# Altium PCB ADL5511.PcbDoc
Units mil, origin at the board's own origin, x right, y up, seen from the top; angles counter-clockwise.
Board outline 920 x 1005 mil, 4 copper layers (Top Layer, Layer 1, Layer 2, Bottom Layer), stack 23.756 mil thick; 34 components, 21 nets, 104 pads, 151 vias.
Unrouted connection lines stored in the file: 1.
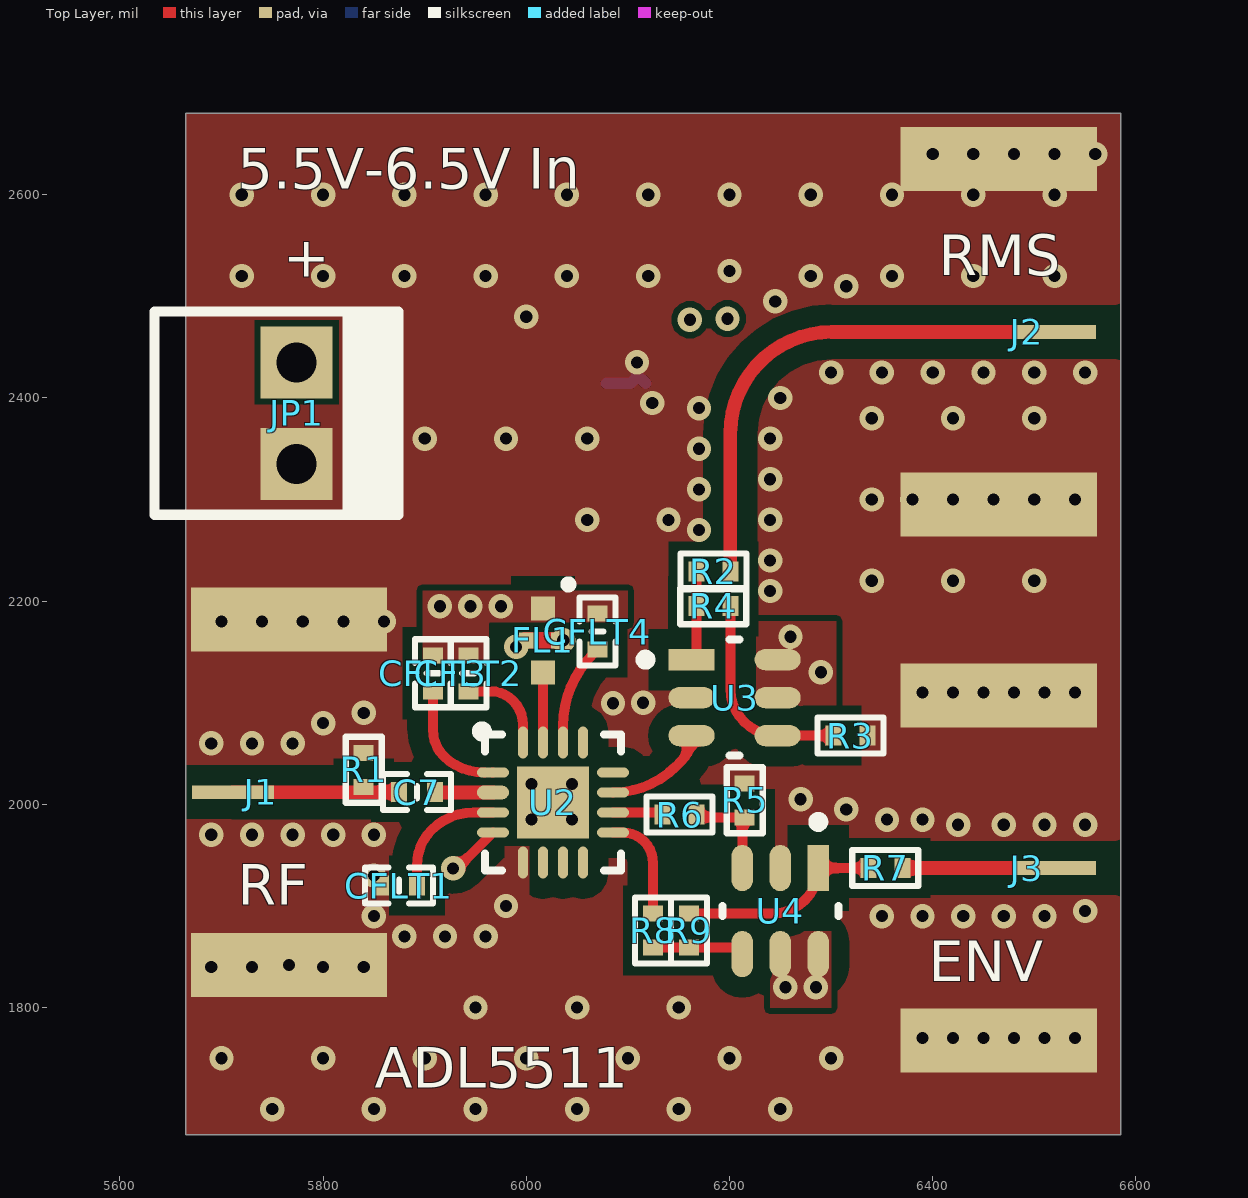
[diagram p0: Top Layer view]
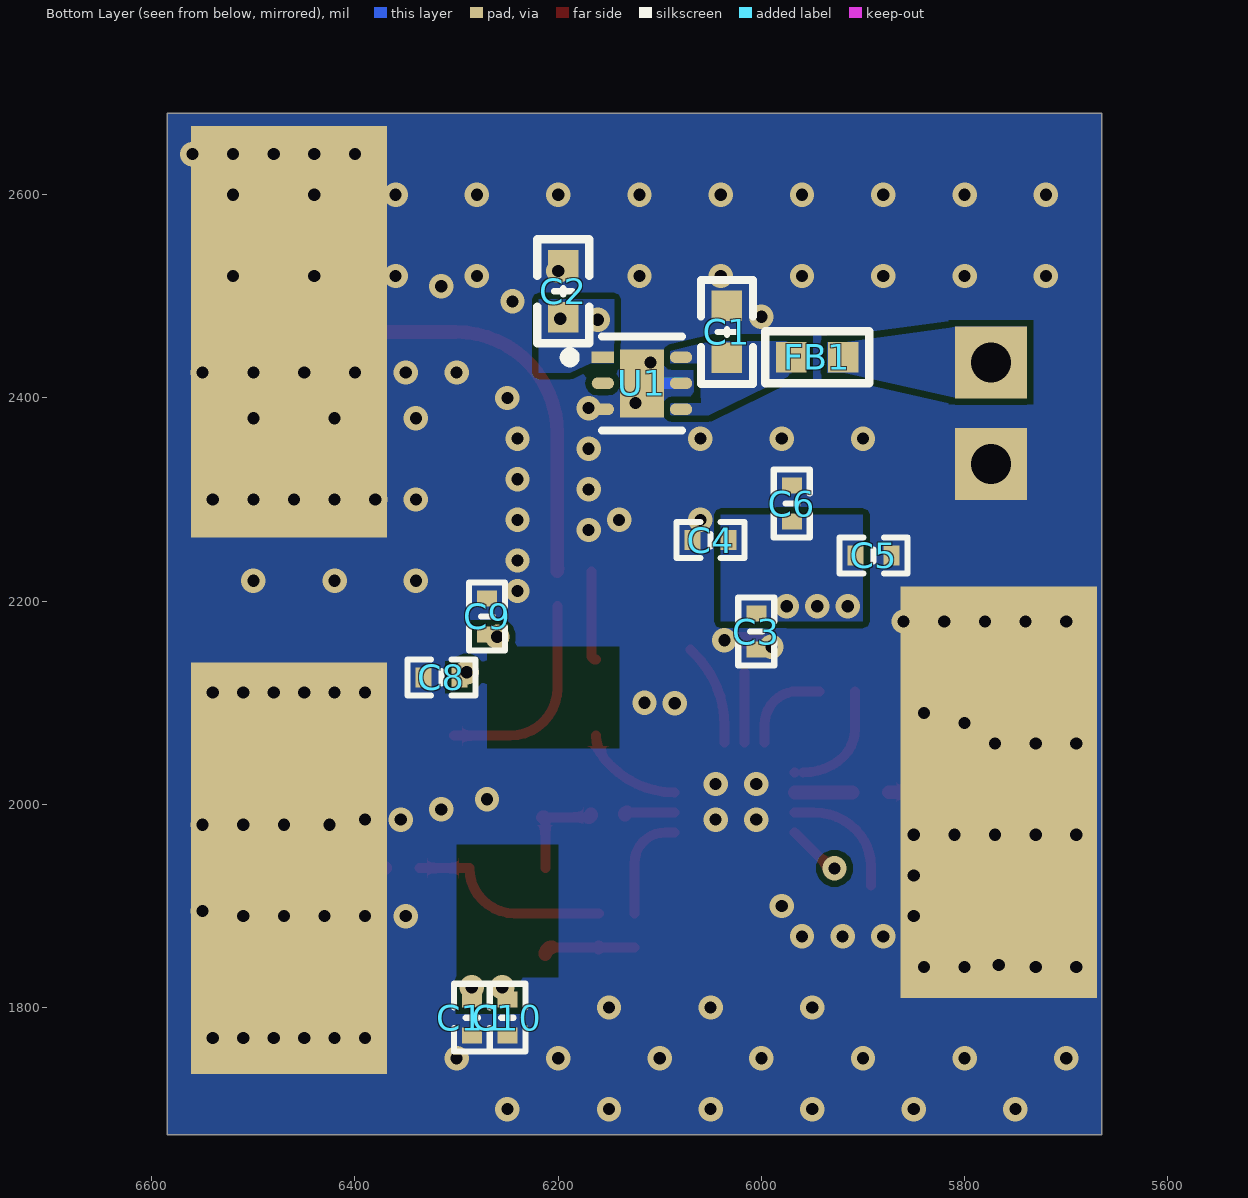
[diagram p1: Bottom Layer view, seen from below]
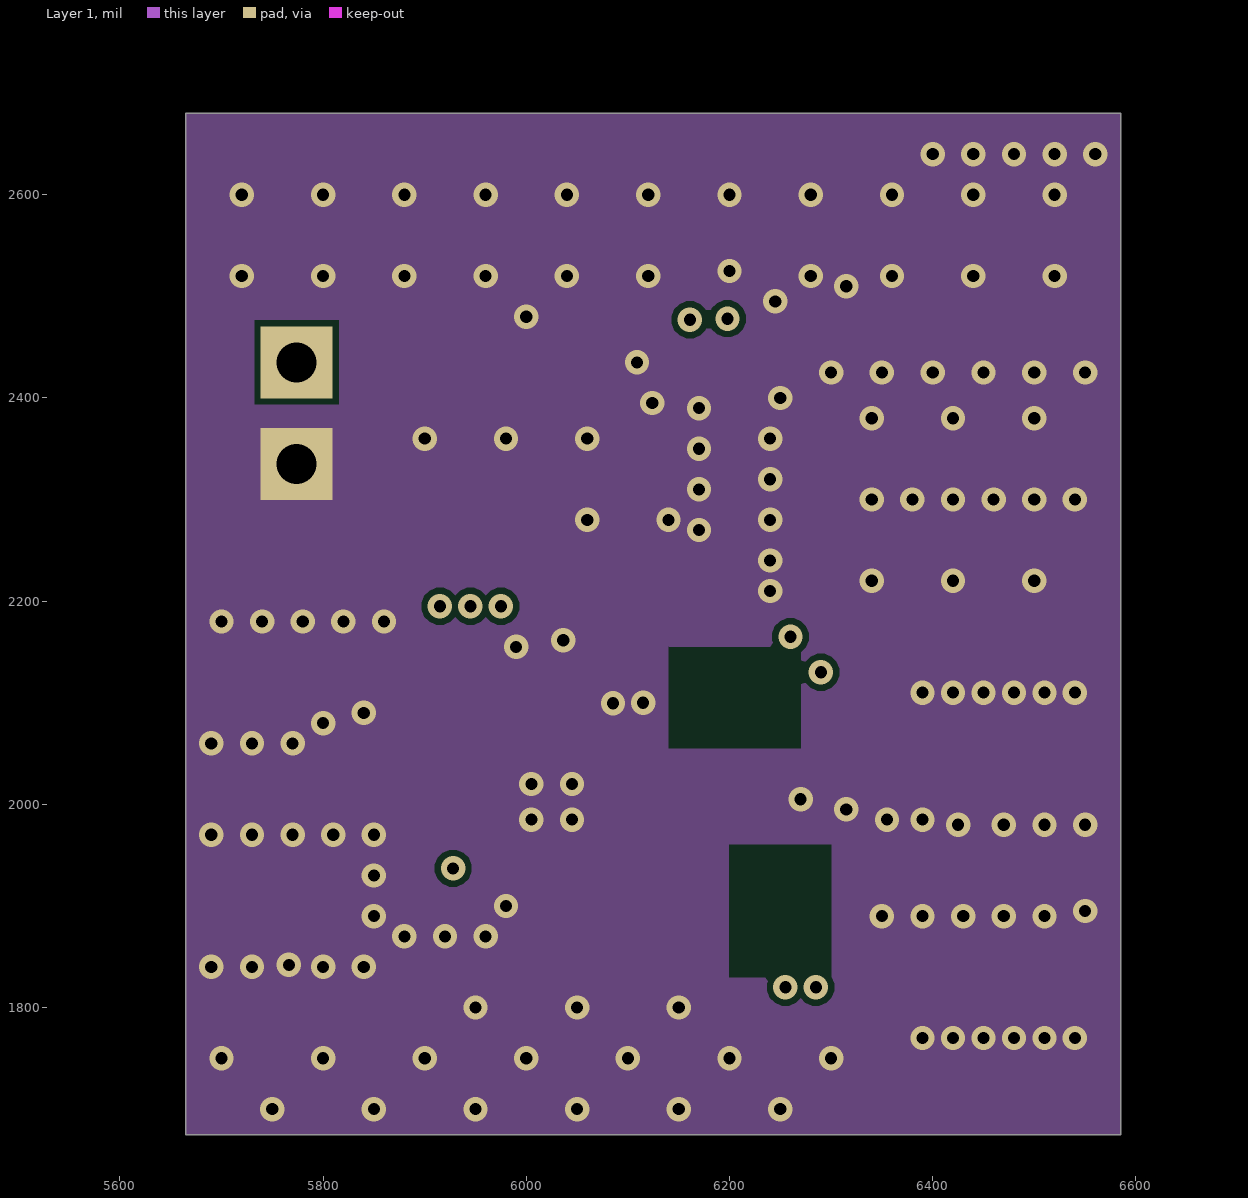
[diagram p2: Layer 1]
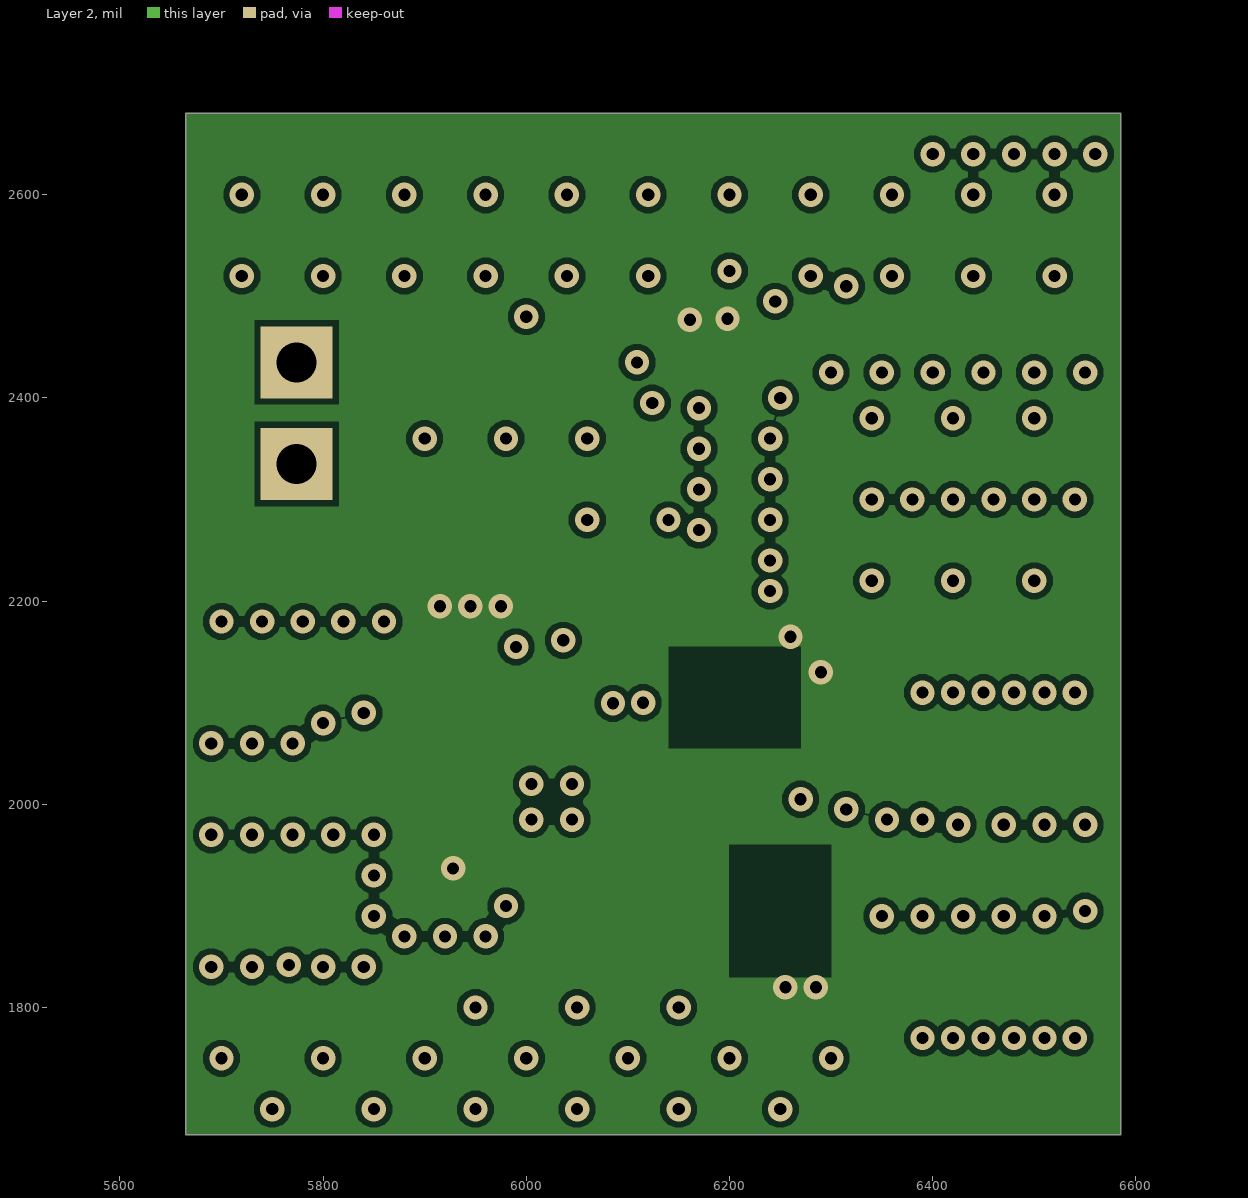
[diagram p3: Layer 2]
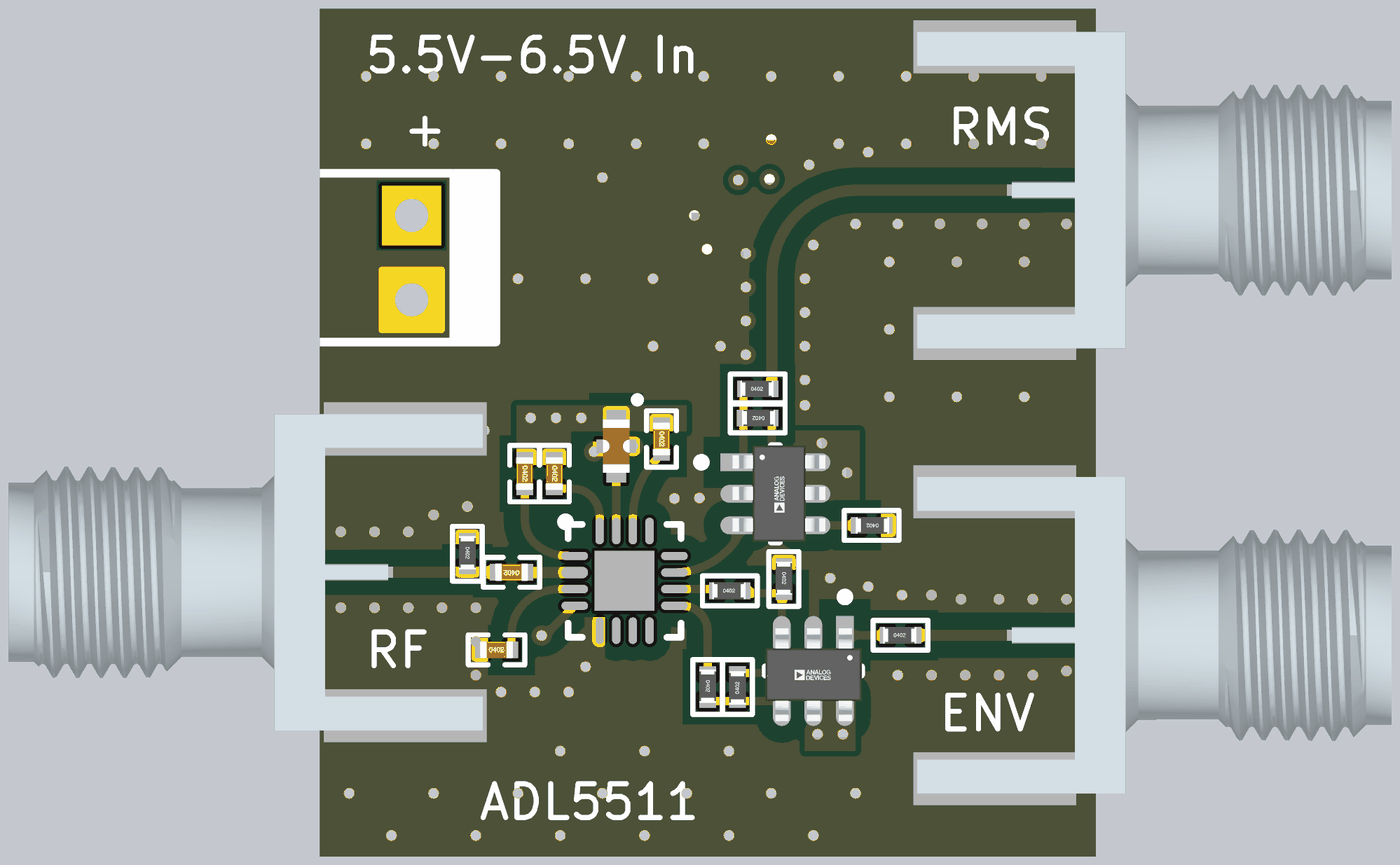
[diagram p4: 3D render of the assembled board from above, using the file's embedded part models]
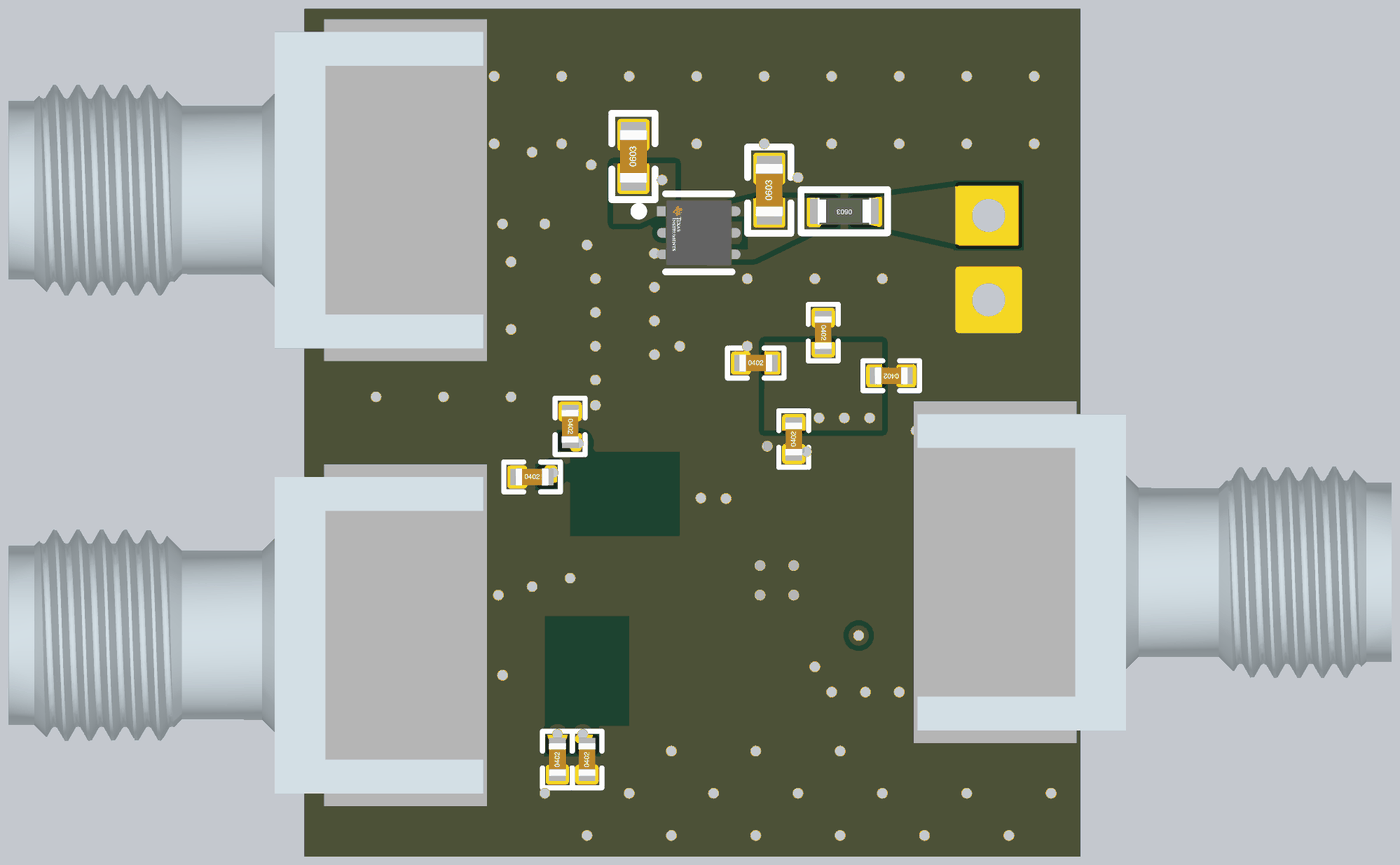
[diagram p5: 3D render of the assembled board from below, using the file's embedded part models]

## Layer stack, top to bottom
Top Solder: solder mask 0.4, Solder Resist, Dk 3.5
Top Layer: signal copper 1.4
Dielectric 2: prepreg 2.8, PP-006, Dk 4.1
Layer 1: signal copper 1.378
Dielectric 1: dielectric 12.6, FR-4, Dk 4.8
Layer 2: signal copper 1.378
Dielectric 3: prepreg 2.8, PP-006, Dk 4.1
Bottom Layer: signal copper 1.4
Bottom Solder: solder mask 0.4, Solder Resist, Dk 3.5

## Board outline
5665,1675 6585,1675 6585,2680 5665,2680

## Design rules (kind name [scope] priority, off if disabled: settings)
Clearance [All] p1: gap=6 ignorepadtopadclearanceinfootprint=TRUE
PlaneConnect [All] p1: planeconnectstyle=Direct reliefexpansion=20 reliefentries=4 reliefconductorwidth=10 reliefairgap=10
PolygonConnect [All] p1: connectstyle=Direct reliefconductorwidth=10 reliefentries=4 polygonreliefangle="90 Angle" airgapwidth=10
RoutingVias [All] p1: holewidth=28 width=50 viastyle="Through Hole" minholewidth=28 minwidth=50 maxholewidth=28 maxwidth=50
SolderMaskExpansion [All] p1: expansion=4 istentingtop=FALSE
Width [All] p1: maxlimit=20 minlimit=5 preferedwidth=10
29 further rules are at their usual default settings.

## Components (designator, comment, footprint, x,y, rotation, side; value= is the part's Value field where it differs from the comment)
C1 "1uF" "C 0603_L" 6034,2465 r90 bottom
C2 "4.7uF" "C 0603_L" 6195,2505 r90 bottom
C3 "100nF" "C 0402_L" 6005,2170 r90 bottom
C4 "100nF" "C 0402_L" 6050,2260 r180 bottom
C5 "100nF" "C 0402_L" 5889.5,2245 r0 bottom
C6 "100nF" "C 0402_L" 5970.08,2296.09 r270 bottom
C7 "100pF" "C 0402_L" 5892.33,2012 r180 top
C8 "100nF" "C 0402_L" 6315,2125 r180 bottom
C9 "100nF" "C 0402_L" 6270,2185 r270 bottom
C10 "100nF" "C 0402_L" 6250,1790 r90 bottom
C11 "100nF" "C 0402_L" 6285,1790 r90 bottom
CFLT1 "100pF" "C 0402_L" 5874.57,1920.01 r0 top
CFLT2 "330pF" "C 0402_L" 5943,2129 r270 top
CFLT3 "820pF" "C 0402_L" 5908,2129 r270 top
CFLT4 "220nF" "C 0402_L" 6070,2170 r270 top
FB1 "120磁珠" "R 0603_L" 5945,2440 r0 bottom
FL1 "NFM18CC223R1C3D" FIL_NFM18CC223R1C3D 6016.43,2161.45 r270 top
J1 "132414" CONN_132414_AMP 5566.33,2012 r90 top
J2 "132414" CONN_132414_AMP 6665.05,2465 r270 top
J3 "132414" CONN_132414_AMP 6665.05,1937.33 r270 top
JP1 "HDR-1X2" KF2510-LI-2P 5774,2385 r270 top
R1 "75" "R 0402_L" 5840,2035 r270 top
R2 "49.9" "R 0402_L" 6183.14,2229.28 r0 top
R3 "1.1K" "R 0402_L" 6320.05,2067.6 r180 top
R4 "1.3K" "R 0402_L" 6185,2195 r180 top
R5 "680" "R 0402_L" 6215,2005 r270 top
R6 "510" "R 0402_L" 6150,1990 r0 top
R7 "49.9" "R 0402_L" 6352.34,1937.34 r0 top
R8 "510" "R 0402_L" 6124.81,1876.89 r270 top
R9 "680" "R 0402_L" 6160,1875 r90 top
U1 "LP5912-5.0DRVT" FP-DRV0006A-IPC_C 6117.51,2414.41 r180 bottom
U2 "ADL5511ACPZ-R7" ADI-CP-16-22_N 6026.28,2001.84 r0 top
U3 "ADA4807-1ARJZ-R2" FP-RJ-6-IPC_C 6205,2105 r0 top
U4 "ADA4807-1ARJZ-R2" FP-RJ-6-IPC_C 6250,1895 r270 top

## Footprints (in the part's own frame and the unit in brackets; to place one, negate y for a bottom-side part, rotate by r counter-clockwise, add the part's x,y. Pads: shape width x height; smd on the part's side, far side on the other; paste and mask are expansions set on the pad)
ADI-CP-16-22_N [mm] "QFN, 16-Leads, Body 3x3mm, Pitch 0.5mm, Thermal Pad 1.75x1.75mm, IPC Medium Density"
  oval 0.8x0.25 smd: 1(-1.5,0.75) 3(-1.5,-0.25) 4(-1.5,-0.75) 9(1.5,-0.75) 10(1.5,-0.25) 11(1.5,0.25) 12(1.5,0.75)
  oval 0.8x0.342 smd: 2(-1.5,0.25)
  oval 0.25x0.8 smd: 5(-0.75,-1.5) 6(-0.25,-1.5) 7(0.25,-1.5) 8(0.75,-1.5) 13(0.75,1.5) 14(0.25,1.5) 15(-0.25,1.5) 16(-0.75,1.5)
  rect 1.8x1.8 smd: 17(0,0)
  silkscreen extent -1.9,-1.7 1.7,1.9, body extent -1.55,-1.55 1.55,1.55, height 0.8
"C 0402_L" [mm] "无极性贴片电容"
  rect 0.4x0.5 smd: 1(-0.45,0) 2(0.45,0)
  silkscreen extent -0.85,-0.45 0.85,0.45, body extent -0.5,-0.26 0.5,0.26, height 0.53
"C 0603_L" [mil] "无极性贴片电容"
  rect 30x30 smd: 1(-25.59,0) 2(25.59,0)
  silkscreen extent -51,-26 51,26, body extent -31,-16 31,16, height 32
CONN_132414_AMP [mil]
  rect 13.48x81 smd paste+0 mask+0: 1(0,-145)
  rect 63x193 smd mask+0: 2(-170,-200) 3(170,-200)
  rect 405x193 smd far side mask+0: 4(0,-200)
  body extent -188,-292 188,270, height 162
FIL_NFM18CC223R1C3D [mm]
  rect 0.6x0.6 smd: 1(-0.8,0) 3(0.8,0)
  rect 0.4x0.4 smd: 2(0,0.4) 2_1(0,-0.4)
  Top Layer region: 0.2,-0.5 -0.2,-0.5 -0.2,0.508 0.2,0.508
  silkscreen extent -1.5,0.54 -1.3,0.73, body extent -0.8,-0.4 0.8,0.4, height 0.7
FP-DRV0006A-IPC_C [mm]
  rect 0.556x0.292 smd paste+0 mask+0: 1(-0.978,0.65)
  rrect100% 0.556x0.292 smd paste+0 mask+0: 2(-0.978,0) 3(-0.978,-0.65) 4(0.978,-0.65) 5(0.978,0) 6(0.978,0.65)
  rect 1.1x1.7 smd paste-1000 mask+0: 7(0,0)
  silkscreen extent -1.93,-1.17 1,1.17, body extent -1,-1 1,1, height 0.8
FP-RJ-6-IPC_C [mm]
  rect 1.156x0.532 smd paste+0 mask+0: 1(-1.075,0.95)
  rrect100% 1.156x0.532 smd paste+0 mask+0: 2(-1.075,0) 3(-1.075,-0.95) 4(1.075,-0.95) 5(1.075,0) 6(1.075,0.95)
  silkscreen extent -2.35,-1.45 0.12,1.45, body extent -1.75,-1.55 1.75,1.55, height 0.25
KF2510-LI-2P [mm] "接插件/2A"
  rect 1.8x1.8 hole 1: 1(-1.27,0) 2(1.27,0)
  silkscreen extent -2.59,-3.56 2.54,2.54, body extent -2.54,-3.5 2.54,2.4, height 11.05
"R 0402_L" [mm] "1/16W贴片电阻 https://item.taobao.com/item.htm?ft=t&id=613637044352"
  rect 0.4x0.5 smd: 1(-0.4,0) 2(0.45,0)
  silkscreen extent -0.8,-0.45 0.85,0.45, body extent -0.5,-0.25 0.5,0.25, height 0.3
"R 0603_L" [mil] "1/10W贴片电阻 https://item.taobao.com/item.htm?ft=t&id=613637044352"
  rect 30x30 smd: 1(-25.59,0) 2(25.59,0)
  silkscreen extent -51,-26 51,26, body extent -31,-16 31,16, height 16

## Part data
C1 C2 C3 C4 C5 C6 C7 C8 C9 C10 C11 CFLT1 CFLT2 CFLT3 CFLT4: library part C, "贴片电容", BOM名称=贴片电容, 下单链接=https://item.taobao.com/item.htm?ft=t&id=613637044352, 淘宝ID=小糖豆的小窝窝
FB1 R1 R2 R3 R4 R5 R6 R7 R8 R9: library part R, "贴片电阻", BOM名称=贴片电阻, 下单链接=https://item.taobao.com/item.htm?ft=t&id=613637044352, 淘宝ID=小糖豆的小窝窝
FL1: "SMD Capacitor with Capacitance: 22000pF Tol. 20%. Rated Voltage: 16Vdc", Package=NONSTANDARD, Availability="In Stock", Check_prices=https://www.snapeda.com/parts/NFM18CC223R1C3D/Murata/view-part/?ref=eda, MF=Murata, MP=NFM18CC223R1C3D, Price=None, Purchase-URL=https://pricing.snapeda.com/search/part/NFM18CC223R1C3D/?ref=eda, SnapEDA_Link=https://www.snapeda.com/parts/NFM18CC223R1C3D/Murata/view-part/?ref=snap
J1 J2 J3: "No Description Available", Mfr_Name="Amphenol ICC", Copyright="Copyright (C) 2022 Ultra Librarian. All rights reserved.", Manufacturer_Part_Number=132414, RefDes=RefDes, Type=DEV
JP1: library part "Header 2", "2P接插件", BOM名称=2P接插件, 下单链接=https://item.taobao.com/item.htm?ft=t&id=613637044352, 淘宝ID=小糖豆的小窝窝
U1: library part CMP-04917-000099-1, "IC REG LINEAR 5.0V 500MA 6SON", Dropout Voltage=950mV, Max Operating Temperature=125°C, Min Operating Temperature=-40°C, Output Current=500mA, Output Voltage=3.3V, Quiescent Current=30uA, Lead Free="Lead Free", Mount="Surface Mount", Number of Pins=6, Number of Regulators=1, Packaging="Tape and Reel", RoHS Compliant=Yes
U2: library part CMP-0284-00041-1, "DC to 6 GHz Envelope and TruPwr RMS Detector, CP-16-22, Pb-Free, 54 Tube", RF Frequency (MHz)=6GHz, Supply Current=21.5mA, Temp Stability (dB)=250mdB, Voltage Supply (V)="4.75 to 5.25", Code_JEDEC=MO-220-WEED, ComponentLink1Description="Manufacturer URL", ComponentLink1URL=www.analog.com, ComponentLink2Description=Datasheet, ComponentLink2URL=http://www.analog.com/static/imported-files/data_sheets/ADL5511.pdf, ComponentLink3Description="Package Specification", ComponentLink3URL=http://www.analog.com/static/imported-files/packages/PKG_PDF/LFCSP(CP)/CP-16/CP_16_22.pdf, DatasheetVersion="Rev. 0", Dynamic Range (dB)=47dB, Output Response="Linear in Voltage", PackageDescription="16-Lead Lead Frame Chip Scale Package [LFCSP_WQ]", PackageReference=CP-16-22, PackageVersion=111808-A, Product Description="Crest factor detector with rms and envelope outputs", Response Time (ns typ)=10Âµs
U3 U4: library part CMP-09116-000179-1, "IC OPAMP VFB 1 CIRCUIT SOT23-6", Case/Package=SOT-23-6, Dual Supply Voltage=5V, Input Bias Current=1.2uA, Input Offset Voltage (Vos)=20uV, Max Frequency=100kHz, Max Input Voltage=11V, Max Operating Temperature=125°C, Min Input Voltage=2.7V, Min Operating Temperature=-40°C, Min Supply Voltage=3V, Operating Supply Current=950uA, Operating Supply Voltage=10V, Output Current=60mA, Output Current per Channel=106mA, Power Supply Rejection Ratio (PSRR)=105dB, Voltage Gain=130dB, -3db Bandwidth=180MHz, Bandwidth=200MHz, Common Mode Rejection Ratio=96dB, Contact Plating=Tin, Gain Bandwidth Product=200MHz, Height=1.3mm, Lead Free="Contains Lead", Length=3mm, Max Supply Voltage=11V, Mount="Surface Mount", Number of Amplifiers=1, Number of Circuits=1, Number of Pins=6, Packaging="Cut Tape", REACH SVHC="No SVHC", RoHS Compliant=Yes, Slew Rate=225V/µs, Width=1.7mm

## Via types
v1: diameter 24, hole 12, Top Layer to Bottom Layer, tented both sides, 151 vias

## Nets (pads, with @x,y where several pads share a name; then routed paths per layer and width w, separated by ;. In a path a pad name is that pad's centre, name@x,y a point inside that pad or via, vN(x,y) a via of type N, cw(c..) or ccw(c..) an arc to the next point about the centre after c; other vN are vias at no path point)
+5: C2.1 C3.2 C4.2 C5.2 C6.2 C8.2 C9.2 C10.2 C11.2 CFLT2.1 CFLT3.1 CFLT4.1 FL1.1 U1.1 U2.4 U3.5 U3.6 U4.5 U4.6 | length 53.4
  Top Layer w9.84: v1(5928,1937) ccw(c5928,1946.44) 5934.67,1939.76 U2.4
  other v1: 6255,1820 6285,1820 6290,2130 6260,2165 5915,2195 5945,2195 5975,2195 6161,2477 6198,2478
EREF: R8.1 U2.9 | length 106.3
  Top Layer w9.84: U2.9 6094.8,1972.31 cw(c6094.8,1942.31) 6124.8,1942.31 R8.1
GND: C1.2 C2.2 C3.1 C4.1 C5.1 C6.1 C8.1 C9.1 C10.1 C11.1 CFLT1.1 FL1.2 FL1.2_1 J1.2 J1.3 J1.4 J2.2 J2.3 J2.4 J3.2 J3.3 J3.4 JP1.2 R1.1 R3.1 R5.1 U1.3 U1.5 U1.7 U2.5 U2.17 U3.2 U4.2 | length 58.3
  Bottom Layer w11.52: U1.5 6102.62,2414.41 U1.7@6110.06,2421.85 ; v1(6109,2435) 6109,2422.91 U1.7
  other v1: 5750,1700 5850,1700 5950,1700 6050,1700 6150,1700 6250,1700 5700,1750 5800,1750 5900,1750 6000,1750 6100,1750 6200,1750 6300,1750 6390,1770 6420,1770 6450,1770 6480,1770 6510,1770 6540,1770 5950,1800 6050,1800 6150,1800 5690,1840 5730,1840 5800,1840 5840,1840 5766.33,1842 5880,1870 5920,1870 5960,1870 5850,1890 6350,1890 6390,1890 6430,1890 6470,1890 6510,1890 6550,1895 5980,1900 5850,1930 5690,1970 5730,1970 5770,1970 5810,1970 5850,1970 6425,1980 6470,1980 6510,1980 6550,1980 6005,1985 6045,1985 6355,1985 6390,1985 6315,1995 6270,2005 6005,2020 6045,2020 5690,2060 5730,2060 5770,2060 5800,2080 5840,2090 6085.33,2099.44 6115,2100 6390,2110 6420,2110 6450,2110 6480,2110 6510,2110 6540,2110 5990,2155 6036.43,2161.45 5700,2180 5740,2180 5780,2180 5820,2180 5860,2180 6240,2210 6340,2220 6420,2220 6500,2220 6240,2240 6170,2270 6060,2280 6140,2280 6240,2280 6340,2300 6380,2300 6420,2300 6460,2300 6500,2300 6540,2300 6170,2310 6240,2320 6170,2350 5900,2360 5980,2360 6060,2360 6240,2360 6340,2380 6420,2380 6500,2380 6170,2390 6124,2395 6250,2400 6300,2425 6350,2425 6400,2425 6450,2425 6500,2425 6550,2425 6000,2480 6245,2495 6315,2510 5720,2520 5800,2520 5880,2520 5960,2520 6040,2520 6120,2520 6280,2520 6360,2520 6440,2520 6520,2520 6200,2525 5720,2600 5800,2600 5880,2600 5960,2600 6040,2600 6120,2600 6200,2600 6280,2600 6360,2600 6440,2600 6520,2600 6400,2640 6440,2640 6480,2640 6520,2640 6560,2640
NetC1_1: C1.1 FB1.2 U1.4 U1.6
NetC7_1: C7.1 U2.2 | length 57.3
  Top Layer w9.84: C7.1 C7.1@5910.36,2011.68
  Top Layer w13.48: C7.1@5910.36,2011.68 U2.2
NetC7_2: C7.2 J1.1 R1.2 | length 163.3
  Top Layer w13.48: J1.1 5841.33,2012 C7.2
NetCFLT1_2: CFLT1.2 U2.3 | length 123.7
  Top Layer w9.84: CFLT1.2 5892.29,1939.48 cw(c5942.52,1939.48) 5907,1975 cw(c5948.03,1933.97) 5948.03,1992 U2.3
NetCFLT2_2: CFLT2.2 U2.16 | length 90.2
  Top Layer w9.84: CFLT2.2 5964.58,2111.29 cw(c5964.58,2079.58) 5987,2102 cw(c5963.47,2078.47) 5996.75,2078.47 U2.16
NetCFLT3_2: CFLT3.2 U2.1 | length 111.7
  Top Layer w9.84: CFLT3.2 5908,2073.64 ccw(c5944.99,2073.6) 5918.82,2047.45 ccw(c5957.24,2085.84) U2.1@5958.98,2031.55 ; U2.1@5966.7,2031.37 U2.1
NetCFLT4_2: CFLT4.2 U2.14 | length 101.1
  Top Layer w9.84: U2.14 6036.12,2076.99 cw(c6136.12,2076.99) 6065.41,2147.7 CFLT4.2
NetJ2_1: J2.1 R2.2 | length 515.1
  Top Layer w13.48: R2.2@6200.49,2232.38 R2.2 6200.85,2365 cw(c6300.85,2365) 6300.85,2465 J2.1
NetJ3_1: J3.1 R7.2 | length 150
  Top Layer w13.48: R7.2 J3.1
NetR2_1: R2.1 R4.2 U3.1 | length 89.6
  Top Layer w9.84: U3.1 ccw(c6162.67,2147.02) 6167.29,2147.02 R4.2 6167.39,2195 R2.1
NetR3_2: R3.2 R4.1 U3.4 | length 209
  Top Layer w9.84: R4.1 6200.75,2114.18 ccw(c6247.33,2114.18) U3.4 R3.2
NetR5_2: R5.2 R6.2 U4.3 | length 100.2
  Top Layer w9.84: R6.2@6170.42,1987.29 R5.2 ; U4.3 R5.2@6212.6,1984.89
  Top Layer w13.48: R6.2 ccw(c6170.42,1990) R6.2@6170.42,1987.29 ; R5.2@6212.6,1984.89 cw(c6215,1984.89) R5.2
NetR7_1: R7.1 R9.2 U4.1 | length 202.1
  Top Layer w9.84: R9.2 6242.78,1892.71 ccw(c6242.78,1937.33) U4.1 R7.1
NetR8_2: R8.2 R9.1 U4.4 | length 91.6
  Top Layer w9.84: R8.2 R9.1 ; R9.1 U4.4@6206.02,1859.25
  Top Layer w13.48: R9.1 R9.1 ; U4.4@6206.02,1859.25 cw(c6206.02,1852.67) U4.4
RAW: FB1.1 JP1.1
VENV: R6.1 U2.10 | length 50.1
  Top Layer w9.84: U2.10 R6.1@6132.25,1992
  Top Layer w13.48: R6.1@6132.25,1992 cw(c6132.25,1990) R6.1
VPOS: FL1.3 U2.15 | length 69.1
  Top Layer w9.84: U2.15 FL1.3
VRMS: U2.11 U3.3 | length 103.9
  Top Layer w9.84: U2.11 ccw(c6085.33,2099.44) 6147.39,2037.39 6152.11,2042.11 ccw(c6126.62,2067.6) U3.3
pads on no net: U1.2 U2.6 U2.7 U2.8 U2.12 U2.13

## Polygon pours and split planes (outlines as drawn)
GND on Bottom Layer "NONET_L-01_P-001" (solid, remove dead copper, pour order 12): 5665,2680 6585,2680 6585,1675 5665,1675
+5 on Bottom Layer "NONET_L-01_P-001" (solid, remove dead copper, pour order 8): 5900,2285 5900,2180 6040,2180 6040,2285
RAW on Bottom Layer "NONET_L-01_P-001" (solid, remove dead copper, pour order 0): 5739,2470 5739,2400 5809,2400 5919,2425 5935,2425 5935,2455 5919,2455 5809,2470
+5 on Bottom Layer "NONET_L-01_P-001" (solid, remove dead copper, pour order 2): 6145,2497 6145,2434 6168,2434 6188,2425 6219,2425 6219,2497
NetC1_1 on Bottom Layer "NONET_L-01_P-001" (solid, remove dead copper, pour order 1): 6090,2394.65 6090,2383 6051.76,2383 5970.4,2422.76 5970.4,2456 6049,2456 6090,2446 6090,2434 6060.35,2434 6059.37,2394.65
GND on Top Layer "NONET_L-01_P-001" (solid, remove dead copper, pour order 10): 6003,1959 6003,1907 5979,1907 5979,1959
GND on Top Layer "NONET_L-01_P-001" (solid, remove dead copper, pour order 9): 5665,2680 6585,2680 6585,1675 5665,1675
+5 on Top Layer "NONET_L-01_P-001" (solid, remove dead copper, pour order 7): 6225,2180 6225,2095 6305,2095 6305,2180
+5 on Top Layer "NONET_L-01_P-001" (solid, remove dead copper, pour order 6): 6240,1875 6240,1800 6300,1800 6300,1875
+5 on Top Layer "NONET_L-01_P-001" (solid, remove dead copper, pour order 3): 5898,2139 5898,2210 6100,2210 6100,2179 5964,2179 ccw(c5966.41,2176.59) 5963,2176.59 5963,2139
GND on Layer 1 "NONET_L-01_P-001" (solid, remove dead copper, pour order 4): 5665,2680 6585,2680 6585,1675 5665,1675
+5 on Layer 2 "NONET_L-01_P-001" (solid, remove dead copper, pour order 13): 5665,2680 6585,2680 6585,1675 5665,1675

## Other copper
Layer 1:
  pour cut-out: 6200,1960 6200,1830 6300,1830 6300,1960
  pour cut-out: 6140,2155 6140,2055 6270,2055 6270,2154.81
Layer 2:
  pour cut-out: 6200,1960 6200,1830 6300,1830 6300,1960
  pour cut-out: 6140,2155 6140,2055 6270,2055 6270,2155
Bottom Layer:
  pour cut-out: 6140,2155 6140,2055 6270,2055 6270,2155
  pour cut-out: 6200,1960 6200,1830 6300.06,1830 6300.26,1830.2 6300,1830.46 6300,1960

## Silkscreen, mask and mechanical layers (free items; w line width, h text height)
Top Overlay:
  text "5.5V-6.5V In" at 5716,2606 h40
  text "RMS" at 6406,2521 h40
  text "+" at 5761,2519.34 h40
  text "RF" at 5716,1901 h40
  text "ENV" at 6396,1826 h40
  text "ADL5511" at 5851,1721 h40
Mechanical 1:
  the board outline again, w6